# EAGLE board PCB (EAGLE 9.7.0)
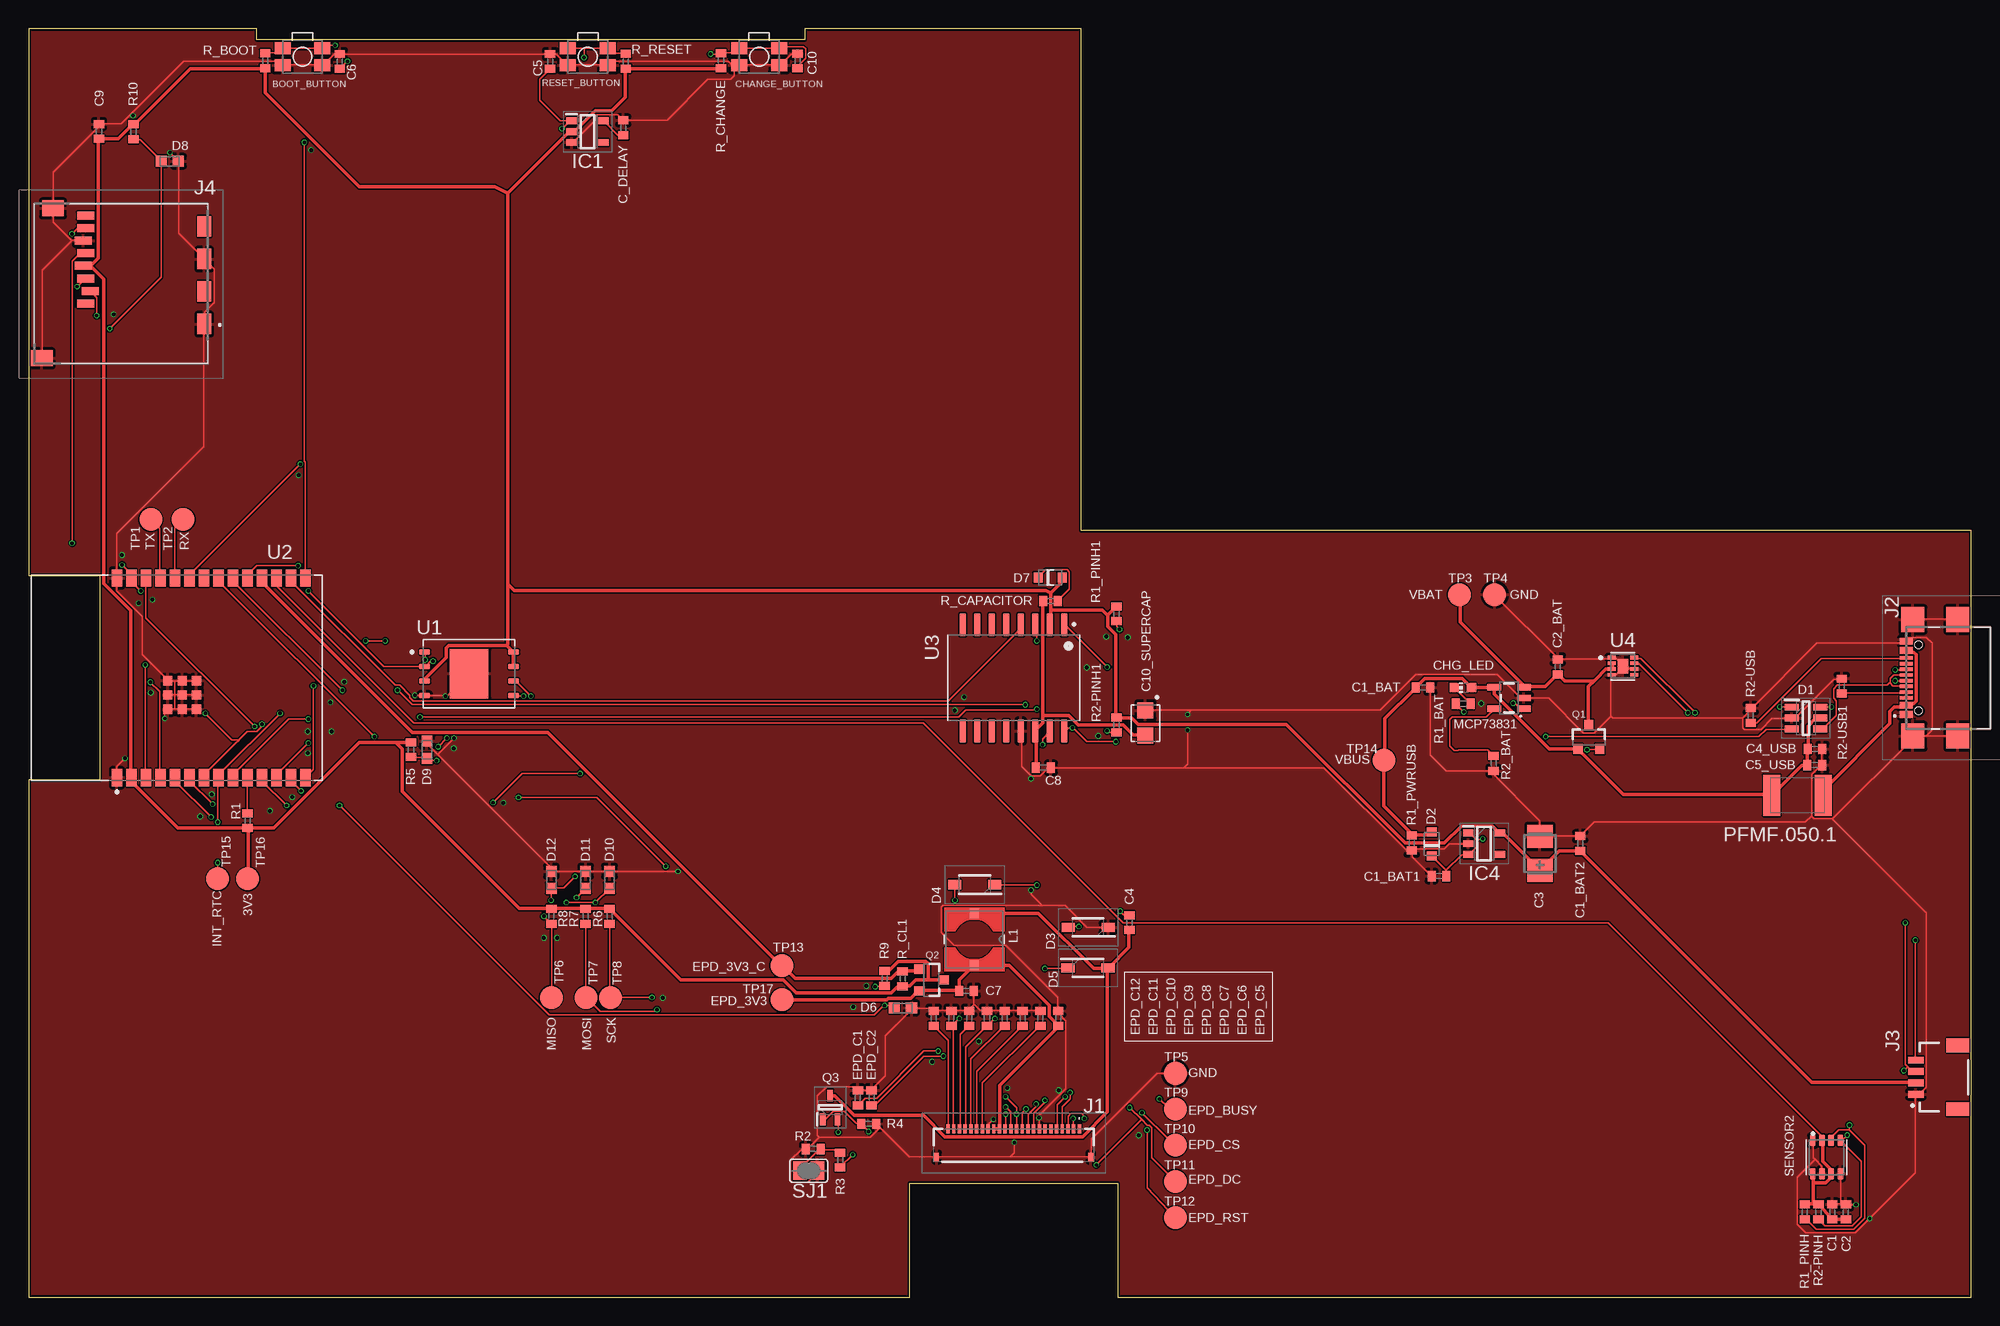
[diagram p0: board, top side]
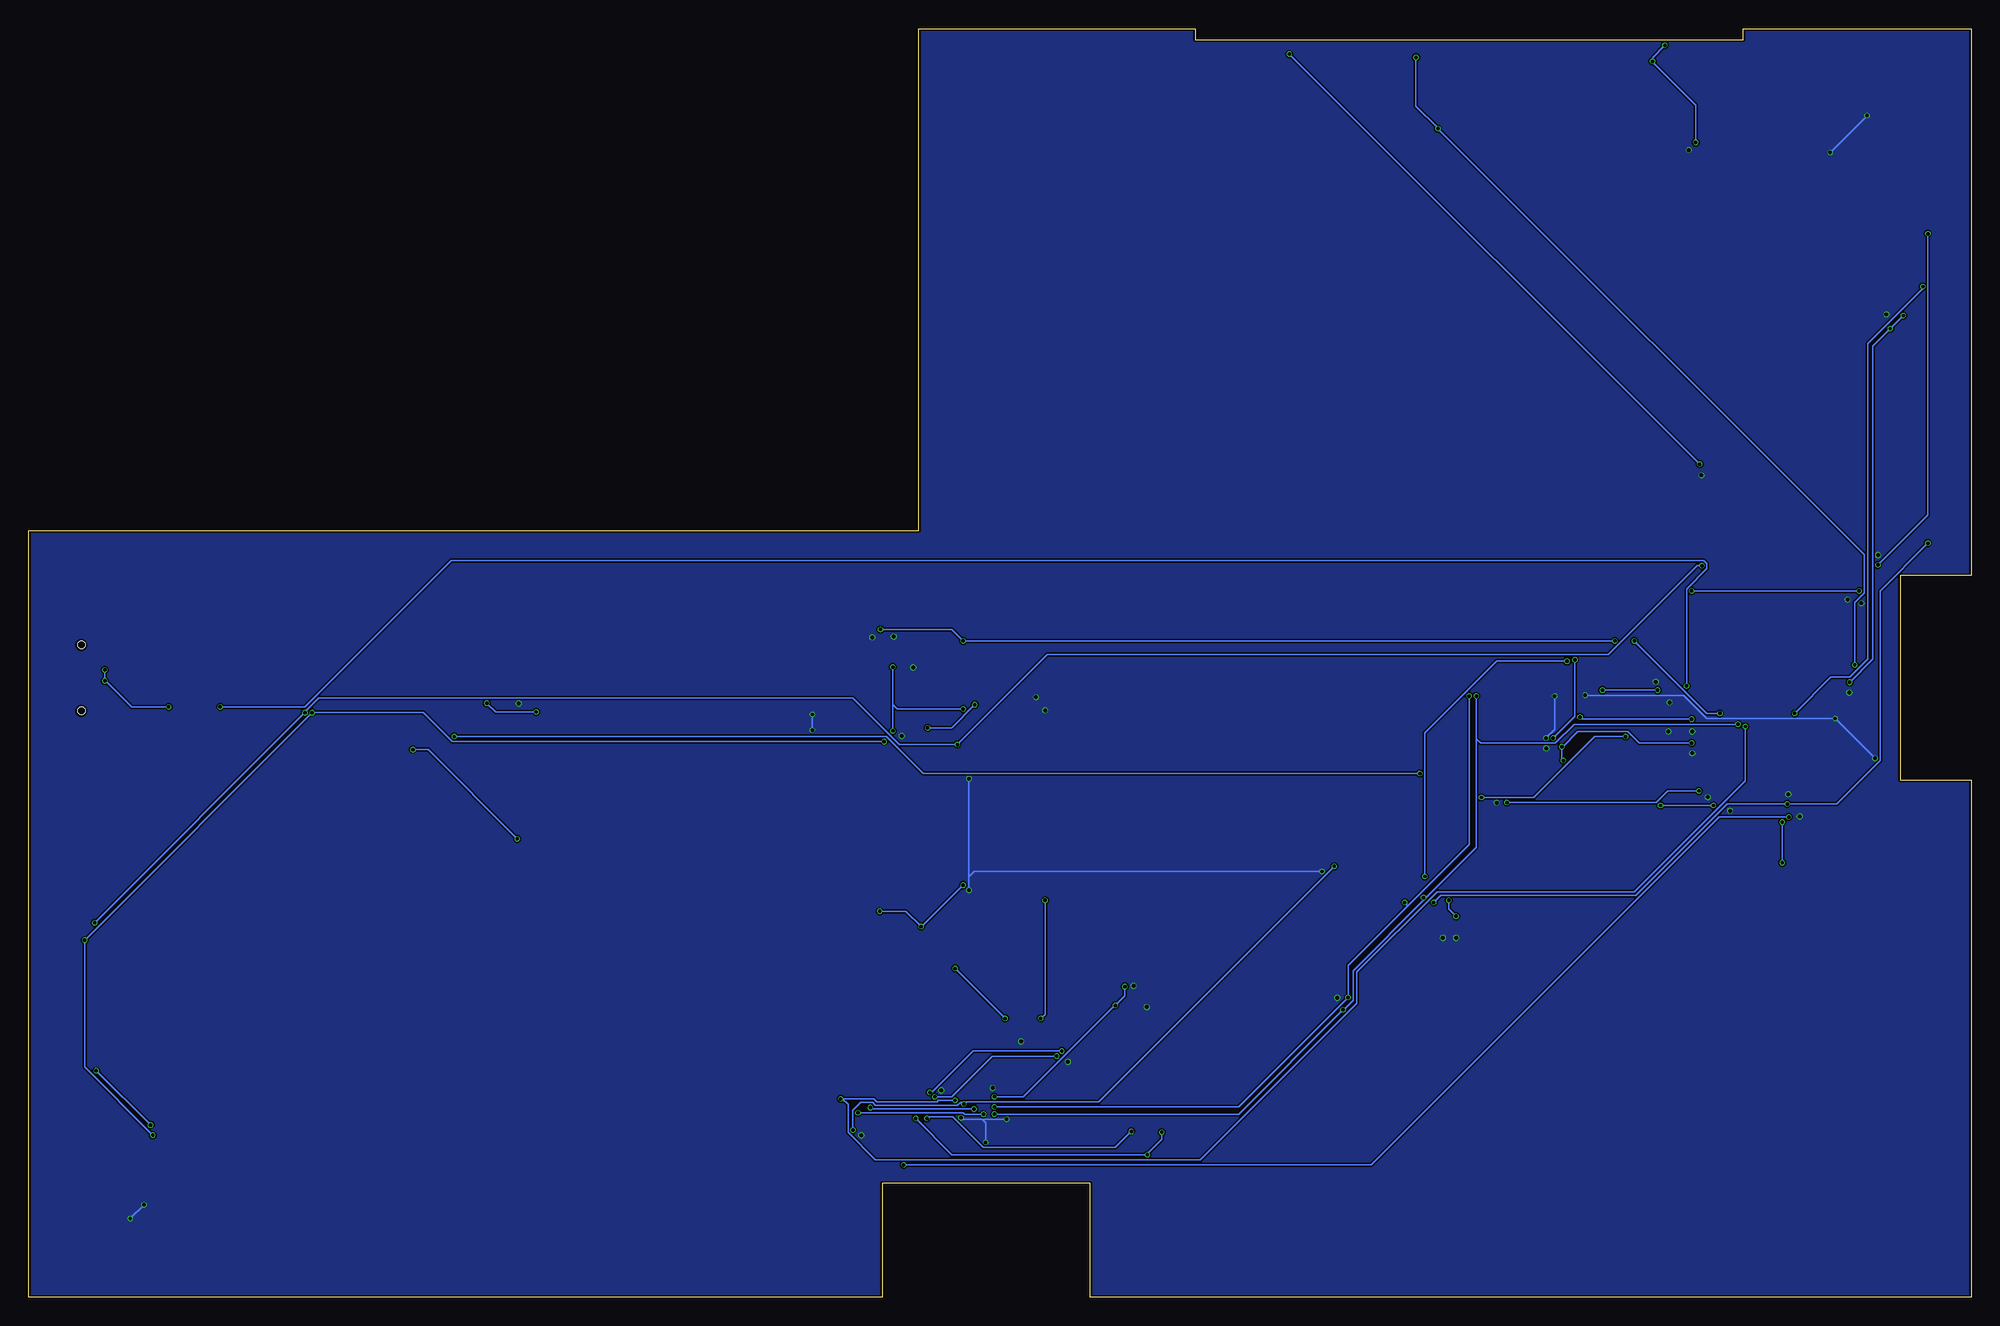
[diagram p1: board, bottom side, seen from below]

Size 170.2 x 111.2 mm. Coordinates in mm from the lower left corner, seen from the top.
Outline: 0,0 77.2,0 77.2,10 95.4,10 95.4,0 170.2,0 170.2,67.2 92.2,67.2 92.2,111.2 68,111.2 68,110.2 20,110.2 20,111.2 0,111.2 0,63.25 6.25,63.25 6.25,45.35 0,45.35 0,0
Copper layers (1*16): Top 0.035mm / dielectric 1.6mm / Bottom 0.035mm
Design rules "jlcpcb-2layers.dru *": minimum track width 5mil, minimum drill 0.3mm, track to track 5mil, track to pad 5mil, pad to pad 5mil, via to via 5mil, smd to smd 5mil, copper to edge 0.2mm, drill to drill 6mil, minimum pad ring 10mil, minimum via ring 3mil, stop-mask expansion 4mil, vias tented up to drill 0mil, thermal gap 10mil
Net classes: 1 NETS: width 0.15 mm; 2 POWER_NETS: width 0.3 mm

## Footprints (pad centres in the part's own frame; a part is rotated, then mirrored left to right if it is on the bottom)
MYBUTTON = smd 1.4 x 1.05: 1 1.75,0.75; 2 -1.75,0.75; 3 -1.75,-0.75; 4 1.75,-0.75
EAGLE-LTSPICE_C0402 = smd 0.7 x 0.9: 1 -0.65,0; 2 0.65,0
RCL_CT3528 = smd 2 x 2.2: + -1.5,0; - 1.5,0
CAPCP3225X100N = smd 1.4 x 1.4: 1 -1.1,0; 2 1.1,0
ADAFRUIT_CHIP-LED0603 = smd 0.8 x 0.8: A 0,-0.75; C 0,0.75
SOT95P280X145-6N = smd 1.2 x 0.6: 1 -1.25,0.95; 2 -1.25,0; 3 -1.25,-0.95; 4 1.25,-0.95; 5 1.25,0; 6 1.25,0.95
ESP32_WROVER_AVX---SD0805S020S1R0_AVX_SD0805S020S1R0_0 = smd 0.8 x 0.9: 1 -1.05,0; 2 1.05,0
SOD3716X135N = smd 1.15 x 0.8: 1 -1.75,0; 2 1.75,0
DIOC1608X36N = smd 0.97 x 0.94: 1 -0.75,0; 2 0.75,0
SOT95P280X125-5N = smd 0.9 x 0.6: 1 -1.4,0.95; 2 -1.4,0; 3 -1.4,-0.95; 4 1.4,-0.95; 5 1.4,0.95
SOT95P280X120-5N = smd 0.9 x 0.6: 1 -1.4,0.95; 2 -1.4,0; 3 -1.4,-0.95; 4 1.4,-0.95; 5 1.4,0.95
FH34SRJ24S05SH99 = smd 0.3 x 0.8: 1 5.75,1.45; 2 5.25,1.45; 3 4.75,1.45; 4 4.25,1.45; 5 3.75,1.45; 6 3.25,1.45; 7 2.75,1.45; 8 2.25,1.45; 9 1.75,1.45; 10 1.25,1.45; 11 0.75,1.45; 12 0.25,1.45; 13 -0.25,1.45; 14 -0.75,1.45; 15 -1.25,1.45; 16 -1.75,1.45; 17 -2.25,1.45; 18 -2.75,1.45; 19 -3.25,1.45; 20 -3.75,1.45; 21 -4.25,1.45; 22 -4.75,1.45; 23 -5.25,1.45; 24 -5.75,1.45 | smd 0.4 x 0.8: MP1 6.75,-1.05; MP2 -6.75,-1.05
SAMACSYS_PARTS_USB4110GFA = smd 0.3 x 1.15: A1 -3.35,3.678; A4 -2.55,3.678; A5 -1.25,3.678; A6 -0.25,3.678; A7 0.25,3.678; A8 1.25,3.678; A9 2.55,3.678; A12 3.35,3.678; B1 3.05,3.678; B4 2.25,3.678; B5 1.75,3.678; B6 0.75,3.678; B7 -0.75,3.678; B8 -1.75,3.678; B9 -2.25,3.678; B12 -3.05,3.678 | smd 2.18 x 2: MP1 -5.11,-0.827; MP2 5.11,-0.827; MP3 -5.11,3.103; MP4 5.11,3.103 | hole 0.65: -2.89,2.603; 2.89,2.603
JST04_1MM_RA = smd 0.6 x 1.35: 1 -1.5,0; 2 -0.5,0; 3 0.5,0; 4 1.5,0 | smd 1.2 x 2: NC1 2.8,-3.675; NC2 -2.8,-3.675
112ATAARR03ATTEND = smd 1.8 x 1.2: G1 10.6,10.4; G2 4.9,10.4; S1 7.75,10.4; S2 2.05,10.4 | smd 1.4 x 1.9: G3 13.6,-3.85; G4 0.45,-2.85 | smd 0.7 x 1.5: P1 8.8,0; P2 7.7,0.4; P3 6.6,0; P4 5.5,-0.2; P5 4.4,0; P6 3.3,-0.2; P7 2.2,0; P8 1.1,0
IND_4828-WE-TPC_WRE = smd 0.889 x 0.762: 1 -2.286,0; 2 2.286,0
ESP32_WROVER_SPARKFUN-IC-POWER_SOT23-5 = smd 0.55 x 1.2: 1 -0.95,-1.3; 2 0,-1.3; 3 0.95,-1.3; 4 0.95,1.3; 5 -0.95,1.3
ESP32C6_VARISTOR_CT/CN1812 = smd 1.5 x 3.6: 1 -2.25,0; 2 2.25,0
ESP32_WROVER_SPARKFUN-DISCRETESEMI_SOT23-3 = smd 0.8 x 0.9: 1 -0.95,-1; 2 0.95,-1; 3 0,1.1
SOT65P210X110-3N = smd 1.05 x 0.5: 1 -1.05,0.65; 2 -1.05,-0.65; 3 1.05,0
ESP32_WROVER_EAGLE-LTSPICE_R0402 = smd 0.7 x 0.9: 1 -0.65,0; 2 0.65,0
ESP32_WROVER_BME680_PSON80P300X300X100-8N = smd 1.016 x 0.5: 1 1.458,1.2; 2 1.458,0.4; 3 1.458,-0.4; 4 1.458,-1.2; 5 -1.458,-1.22; 6 -1.458,-0.4; 7 -1.458,0.4; 8 -1.458,1.2
SJ = smd 1.168 x 1.6: 1 -0.762,0; 2 0.762,0
TP20R = smd 2 x 2: TP 0,0
SON127P600X800X80-9N = smd 0.94 x 0.44: 1 -3.895,1.905; 2 -3.895,0.635; 3 -3.895,-0.635; 4 -3.895,-1.905; 5 3.895,-1.905; 6 3.895,-0.635; 7 3.895,0.635; 8 3.895,1.905 | smd 3.4 x 4.3: 9 0,0
XCVR_ESP32-C6-WROOM-1-N8 = smd 1.5 x 0.9: 1 -8.75,5.26; 2 -8.75,3.99; 3 -8.75,2.72; 4 -8.75,1.45; 5 -8.75,0.18; 6 -8.75,-1.09; 7 -8.75,-2.36; 8 -8.75,-3.63; 9 -8.75,-4.9; 10 -8.75,-6.17; 11 -8.75,-7.44; 12 -8.75,-8.71; 13 -8.75,-9.98; 14 -8.75,-11.25; 15 8.75,-11.25; 16 8.75,-9.98; 17 8.75,-8.71; 18 8.75,-7.44; 19 8.75,-6.17; 20 8.75,-4.9; 21 8.75,-3.63; 22 8.75,-2.36; 23 8.75,-1.09; 24 8.75,0.18; 25 8.75,1.45; 26 8.75,2.72; 27 8.75,3.99; 28 8.75,5.26 | smd 0.8 x 0.8: 29_1 -2.755,0.79; 29_2 -1.505,0.79; 29_3 -0.255,0.79; 29_4 -2.755,-0.46; 29_5 -1.505,-0.46; 29_6 -0.255,-0.46; 29_7 -2.755,-1.71; 29_8 -1.505,-1.71; 29_9 -0.255,-1.71
SOIC127P1032X265-16N = smd 2.05 x 0.59: 1 -4.655,4.445; 2 -4.655,3.175; 3 -4.655,1.905; 4 -4.655,0.635; 5 -4.655,-0.635; 6 -4.655,-1.905; 7 -4.655,-3.175; 8 -4.655,-4.445; 9 4.655,-4.445; 10 4.655,-3.175; 11 4.655,-1.905; 12 4.655,-0.635; 13 4.655,0.635; 14 4.655,1.905; 15 4.655,3.175; 16 4.655,4.445
SON50P200X200X80-9N = smd 0.762 x 0.33: 1 -0.985,0.75; 2 -0.985,0.25; 3 -0.985,-0.25; 4 -0.985,-0.75; 5 0.985,-0.75; 6 0.985,-0.25; 7 0.985,0.25; 8 0.985,0.75 | smd 0.9 x 1.3: 9 0,0

## Placement (x,y rotation side)
BOOT_BUTTON  BUTTON_CUSYOMV1  [MYBUTTON]  24,108.72 180 top
C1  100nF  [EAGLE-LTSPICE_C0402]  158,7.5 90 top
C1_BAT  4.7uF  [EAGLE-LTSPICE_C0402]  122.15,53.45 0 top
C1_BAT1  4.7uF  [EAGLE-LTSPICE_C0402]  123.55,36.93 180 top
C1_BAT2  4.7uF  [EAGLE-LTSPICE_C0402]  135.93,39.79 90 top
C2  100nF  [EAGLE-LTSPICE_C0402]  159.2,7.5 90 top
C2_BAT  4.7uF  [EAGLE-LTSPICE_C0402]  133.95,55.26 90 top
C3  100uF TANT  [RCL_CT3528]  132.4,38.91 90 top
C4  4.7uF/25V  [EAGLE-LTSPICE_C0402]  96.44,32.85 270 top
C4_USB  100nF  [EAGLE-LTSPICE_C0402]  156.5,48.07 0 top
C5  1uF  [EAGLE-LTSPICE_C0402]  45.69,108.32 90 top
C5_USB  4.7uF  [EAGLE-LTSPICE_C0402]  156.48,46.65 0 top
C6  100nF  [EAGLE-LTSPICE_C0402]  27.27,108.32 90 top
C7  10uF  [EAGLE-LTSPICE_C0402]  82.17,26.86 0 top
C8  100nF  [EAGLE-LTSPICE_C0402]  88.9,46.43 0 top
C9  100nF  [EAGLE-LTSPICE_C0402]  6.17,102.18 90 top
C10  100nF  [EAGLE-LTSPICE_C0402]  67.37,108.36 90 top
C10_SUPERCAP  CPH3225A  [CAPCP3225X100N]  97.84,50.34 270 top
C_DELAY  100nF  [EAGLE-LTSPICE_C0402]  52.1,102.5 90 top
CHANGE_BUTTON  BUTTON_CUSYOMV1  [MYBUTTON]  64,108.72 180 top
CHG_LED  [ADAFRUIT_CHIP-LED0603]  125.65,53.44 90 top
D1  USBLC6-2SC6Y  [SOT95P280X145-6N]  155.7,50.77 0 top
D2  ESP32_WROVER_AVX---SD0805S020S1R0_AVX_SD0805S020S1R0_0_0AVX_SD0805S020S1R0_0_0  [ESP32_WROVER_AVX---SD0805S020S1R0_AVX_SD0805S020S1R0_0]  122.92,39.74 90 top
D3  MBR0530  [SOD3716X135N]  92.82,32.42 180 top
D4  MBR0530  [SOD3716X135N]  82.88,36.17 180 top
D5  MBR0530  [SOD3716X135N]  92.81,28.88 0 top
D6  PGB1010603MR  [DIOC1608X36N]  76.6,25.37 0 top
D7  ESP32_WROVER_AVX---SD0805S020S1R0_AVX_SD0805S020S1R0_0_0AVX_SD0805S020S1R0_0_0  [ESP32_WROVER_AVX---SD0805S020S1R0_AVX_SD0805S020S1R0_0]  89.49,63.08 0 top
D8  PGB1010603MR  [DIOC1608X36N]  12.38,99.57 0 top
D9  PGB1010603MR  [DIOC1608X36N]  34.9,48 90 top
D10  PGB1010603MR  [DIOC1608X36N]  50.9,36.6 90 top
D11  PGB1010603MR  [DIOC1608X36N]  48.8,36.6 90 top
D12  PGB1010603MR  [DIOC1608X36N]  45.8,36.6 90 top
EPD_C1  1uF/50V  [EAGLE-LTSPICE_C0402]  72.65,17.49 90 top
EPD_C2  1uF/50V  [EAGLE-LTSPICE_C0402]  73.85,17.5 90 top
EPD_C5  0.1uF/50V  [EAGLE-LTSPICE_C0402]  90.2,24.47 90 top
EPD_C6  1uF/50V  [EAGLE-LTSPICE_C0402]  88.64,24.47 90 top
EPD_C7  1uF/50V  [EAGLE-LTSPICE_C0402]  87.08,24.47 90 top
EPD_C8  1uF/50V  [EAGLE-LTSPICE_C0402]  85.52,24.47 90 top
EPD_C9  1uF/50V  [EAGLE-LTSPICE_C0402]  83.96,24.47 90 top
EPD_C10  1uF/50V  [EAGLE-LTSPICE_C0402]  82.4,24.47 90 top
EPD_C11  1uF/50V  [EAGLE-LTSPICE_C0402]  80.85,24.47 90 top
EPD_C12  1uF/50V  [EAGLE-LTSPICE_C0402]  79.29,24.47 90 top
IC1  BD5229G-TR  [SOT95P280X125-5N]  48.97,102.17 0 top
IC4  XC6220A331MR-G  [SOT95P280X120-5N]  127.51,39.77 0 top
J1  FH34SRJ-24S-0.5SH_99_  [FH34SRJ24S05SH99]  86.3,13.34 0 top
J2  SAMACSYS_PARTS_USB4110-GF-A  [SAMACSYS_PARTS_USB4110GFA]  168.17,54.3 90 top
J3  QWIIC_RIGHT_ANGLE  [JST04_1MM_RA]  165.32,19.3 90 top
J4  112A-TAAR-R03_ATTEND  [112ATAARR03ATTEND]  5,95.9 270 top
L1  68uH  [IND_4828-WE-TPC_WRE]  82.85,31.38 270 top
MCP73831  ESP32_WROVER_SPARKFUN-IC-POWER_MCP73831  [ESP32_WROVER_SPARKFUN-IC-POWER_SOT23-5]  129.7,52.54 90 top
PFMF.050.1  ESP32C6_VARISTORCN1812  [ESP32C6_VARISTOR_CT/CN1812]  154.96,44 180 top
Q1  20V/4.2A/52mΩ/1.4W  [ESP32_WROVER_SPARKFUN-DISCRETESEMI_SOT23-3]  136.69,49.06 0 top
Q2  20V/4.2A/52mΩ/1.4W  [ESP32_WROVER_SPARKFUN-DISCRETESEMI_SOT23-3]  79.06,27.82 270 top
Q3  SI1308EDL-T1-GE3  [SOT65P210X110-3N]  70.22,16.64 90 top
R1  10K  [ESP32_WROVER_EAGLE-LTSPICE_R0402]  19.19,41.78 90 top
R1_BAT  200  [ESP32_WROVER_EAGLE-LTSPICE_R0402]  125.68,52.03 0 top
R1_PINH  10K  [ESP32_WROVER_EAGLE-LTSPICE_R0402]  155.6,7.5 90 top
R1_PINH1  10K  [ESP32_WROVER_EAGLE-LTSPICE_R0402]  95.31,59.91 90 top
R1_PWRUSB  100K  [ESP32_WROVER_EAGLE-LTSPICE_R0402]  121.16,39.82 90 top
R2  2.2  [ESP32_WROVER_EAGLE-LTSPICE_R0402]  68.74,13.01 0 top
R2-PINH  10K  [ESP32_WROVER_EAGLE-LTSPICE_R0402]  156.8,7.5 90 top
R2-PINH1  10K  [ESP32_WROVER_EAGLE-LTSPICE_R0402]  95.31,50.17 90 top
R2-USB  5k1  [ESP32_WROVER_EAGLE-LTSPICE_R0402]  150.87,51 90 top
R2-USB1  5k1  [ESP32_WROVER_EAGLE-LTSPICE_R0402]  158.83,53.57 90 top
R2_BAT  2K  [ESP32_WROVER_EAGLE-LTSPICE_R0402]  128.34,46.81 90 top
R3  0.47  [ESP32_WROVER_EAGLE-LTSPICE_R0402]  71.09,12.04 90 top
R4  10K  [ESP32_WROVER_EAGLE-LTSPICE_R0402]  73.6,15.21 0 top
R5  10K  [ESP32_WROVER_EAGLE-LTSPICE_R0402]  33.5,48 90 top
R6  10K  [ESP32_WROVER_EAGLE-LTSPICE_R0402]  50.9,33.4 90 top
R7  10K  [ESP32_WROVER_EAGLE-LTSPICE_R0402]  48.8,33.4 90 top
R8  10K  [ESP32_WROVER_EAGLE-LTSPICE_R0402]  45.8,33.4 90 top
R9  10K  [ESP32_WROVER_EAGLE-LTSPICE_R0402]  74.99,27.95 90 top
R10  10K  [ESP32_WROVER_EAGLE-LTSPICE_R0402]  9.19,102.16 90 top
R_BOOT  10K  [ESP32_WROVER_EAGLE-LTSPICE_R0402]  20.73,108.38 90 top
R_CAPACITOR  15  [ESP32_WROVER_EAGLE-LTSPICE_R0402]  89.52,61.04 0 top
R_CHANGE  10K  [ESP32_WROVER_EAGLE-LTSPICE_R0402]  60.66,108.39 90 top
R_CL1  10K  [ESP32_WROVER_EAGLE-LTSPICE_R0402]  76.57,27.93 90 top
R_RESET  10K  [ESP32_WROVER_EAGLE-LTSPICE_R0402]  52.31,108.33 90 top
RESET_BUTTON  BUTTON_CUSYOMV1  [MYBUTTON]  49,108.72 180 top
SENSOR2  ESP32_WROVER_BME680_BME680  [ESP32_WROVER_BME680_PSON80P300X300X100-8N]  157.5,12.3 90 top
SJ1  [SJ]  68.34,11.11 180 top
TP1  TPTP20R  [TP20R]  10.71,68.19 0 top
TP2  TPTP20R  [TP20R]  13.55,68.19 0 top
TP3  TPTP20R  [TP20R]  125.35,61.59 0 top
TP4  TPTP20R  [TP20R]  128.43,61.59 0 top
TP5  TPTP20R  [TP20R]  100.47,19.64 0 top
TP6  TPTP20R  [TP20R]  45.81,26.29 0 top
TP7  TPTP20R  [TP20R]  48.85,26.29 0 top
TP8  TPTP20R  [TP20R]  50.97,26.29 0 top
TP9  TPTP20R  [TP20R]  100.47,16.52 0 top
TP10  TPTP20R  [TP20R]  100.47,13.34 0 top
TP11  TPTP20R  [TP20R]  100.47,10.17 0 top
TP12  TPTP20R  [TP20R]  100.47,6.99 0 top
TP13  TPTP20R  [TP20R]  65.98,29.09 0 top
TP14  TPTP20R  [TP20R]  118.72,47.09 0 top
TP15  TPTP20R  [TP20R]  16.56,36.69 0 top
TP16  TPTP20R  [TP20R]  19.2,36.69 0 top
TP17  TPTP20R  [TP20R]  65.98,26.09 0 top
U1  W25Q512JVEIQ  [SON127P600X800X80-9N]  38.59,54.66 0 top
U2  ESP32-C6-WROOM-1-N8  [XCVR_ESP32-C6-WROOM-1-N8]  13,54.3 90 top
U3  DS3231SN#  [SOIC127P1032X265-16N]  86.3,54.3 270 top
U4  MAX17048G+T10  [SON50P200X200X80-9N]  139.67,55.32 0 top

## Library data of the parts
BOOT_BUTTON CHANGE_BUTTON CHG_LED PFMF.050.1 RESET_BUTTON SJ1 TP1-TP17 = DeskAssistant v19 v1
C1 C1_BAT C1_BAT1 C1_BAT2 C2 C2_BAT C4 C4_USB C5 C5_USB C6-C10 C_DELAY EPD_C1 EPD_C2 EPD_C5-EPD_C12 = DeskAssistant v19 v1; SPICEMODEL: NONE; SPICEPREFIX: C
C3 = DeskAssistant v19 v1; SPICEPREFIX: C
C10_SUPERCAP = DeskAssistant v19 v1; AVAILABILITY: Not in stock; CHECK_PRICES: https://www.snapeda.com/parts/CPH3225A/Seiko+Instruments/view-part/?ref=eda; DESCRIPTION: 11 mF (EDLC) Supercapacitor 3.3 V 1210 (3225 Metric) - -; MF: Seiko Instruments; MP: CPH3225A; PACKAGE: 1210 Seiko; PRICE: None; PURCHASE-URL: https://www.snapeda.com/api/url_track_click_mouser/?unipart_id=562593&manufacturer=Seiko Instruments&part_name=CPH3225A&search_term=None; SNAPEDA_LINK: https://www.snapeda.com/parts/CPH3225A/Seiko+Instruments/view-part/?ref=snap
D1 = DeskAssistant v19 v1; AVAILABILITY: In Stock; CHECK_PRICES: https://www.snapeda.com/parts/USBLC6-2SC6Y/STMicroelectronics/view-part/?ref=eda; DESCRIPTION: 17V Clamp 5A (8/20µs) Ipp Tvs Diode Surface Mount SOT-23-6; MF: STMicroelectronics; MP: USBLC6-2SC6Y; PACKAGE: SOT-23-6 STMicroelectronics; PRICE: None; SNAPEDA_LINK: https://www.snapeda.com/parts/USBLC6-2SC6Y/STMicroelectronics/view-part/?ref=snap
D2 D7 = DeskAssistant v19 v1; CENTROID_NOT_SPECIFIED: No; DATASHEET: http://datasheets.avx.com/schottky.pdf; DIGIKEY_DESCRIPTION: DIODE SCHOTTKY 20V 1A 0805; DIGIKEY_PART_NUMBER: 478-7800-1-ND; LEAD_FREE: yes; MF: AVX; MOUSER_PART_NUMBER: 581-SD0805S020S1R0; PACKAGE: 0805 (2012 metric); PREFIX: D; ROHS: yes; TEMPERATURE_RANGE_HIGH: +125°C; TEMPERATURE_RANGE_LOW: -55°C
D3-D5 = DeskAssistant v19 v1; AVAILABILITY: In Stock; CHECK_PRICES: https://www.snapeda.com/parts/MBR0530/Onsemi/view-part/?ref=eda; DESCRIPTION: Diode Schottky 30 V 500mA Surface Mount SOD-123; MF: ON Semiconductor; MP: MBR0530; PACKAGE: SOD-123-2 ON Semiconductor; PRICE: None; PURCHASE-URL: https://www.snapeda.com/api/url_track_click_mouser/?unipart_id=179458&manufacturer=ON Semiconductor&part_name=MBR0530&search_term=None; SNAPEDA_LINK: https://www.snapeda.com/parts/MBR0530/Onsemi/view-part/?ref=snap
D6 D8-D12 = DeskAssistant v19 v1; AVAILABILITY: In Stock; CHECK_PRICES: https://www.snapeda.com/parts/PGB1010603MR/Littelfuse/view-part/?ref=eda; DESCRIPTION: 150V (Typ) Clamp - Ipp Tvs Diode Surface Mount 0603 (1608 Metric); MF: Littelfuse Inc.; MP: PGB1010603MR; PACKAGE: 0603 Littelfuse Inc.; PRICE: None; PURCHASE-URL: https://www.snapeda.com/api/url_track_click_mouser/?unipart_id=5659453&manufacturer=Littelfuse Inc.&part_name=PGB1010603MR&search_term=None; SNAPEDA_LINK: https://www.snapeda.com/parts/PGB1010603MR/Littelfuse/view-part/?ref=snap
IC1 = DeskAssistant v19 v1; DESCRIPTION: Voltage Detector with Adjustable Delay Time: CMOS processes are utilized to develop high precision, low current consumption CMOS reset ICs that allow arbitrary setting of the delay time. The extensive lineup includes both Nch Open Drain and CMOS output types in a wide range of detection voltages (from 2.3V to 6.0V, in 0.1V steps), enabling selection of the ideal solution based on customer requirements. In addition, the entire series is of course both lead-free and RoHS-compliant.; HEIGHT: 1.25mm; MANUFACTURER_NAME: ROHM Semiconductor; MANUFACTURER_PART_NUMBER: BD5229G-TR; MOUSER_PART_NUMBER: 755-BD5229G-TR; MOUSER_PRICE-STOCK: https://www.mouser.co.uk/ProductDetail/ROHM-Semiconductor/BD5229G-TR?qs=4kLU8WoGk0vvnhrrYwdszw%3D%3D
IC4 = DeskAssistant v19 v1; DESCRIPTION: LDO Voltage Regulators; HEIGHT: 1.2mm; MANUFACTURER_NAME: Torex; MANUFACTURER_PART_NUMBER: XC6220A331MR-G; MOUSER_PART_NUMBER: 865-XC6220A331MR-G; MOUSER_PRICE-STOCK: https://www.mouser.co.uk/ProductDetail/Torex-Semiconductor/XC6220A331MR-G?qs=AsjdqWjXhJ8ZSWznL1J0gg%3D%3D
J1 = DeskAssistant v19 v1; DESCRIPTION: 24 Position FFC, FPC Connector Contacts, Top and Bottom 0.020" (0.50mm) Surface Mount, Right Angle; HEIGHT: 1.1mm; MANUFACTURER_NAME: Hirose; MANUFACTURER_PART_NUMBER: FH34SRJ-24S-0.5SH(99); MOUSER_PART_NUMBER: 798-FH34SRJ24S05SH99; MOUSER_PRICE-STOCK: https://www.mouser.co.uk/ProductDetail/Hirose-Connector/FH34SRJ-24S-0.5SH99?qs=vcbW%252B4%252BSTIpKBl5ap9J8Fw%3D%3D
J2 = DeskAssistant v19 v1; DESCRIPTION: CONN USB 2.0 TYPE-C R/A SMT; HEIGHT: 3.26mm; MANUFACTURER_NAME: GCT (GLOBAL CONNECTOR TECHNOLOGY); MANUFACTURER_PART_NUMBER: USB4110-GF-A; MOUSER_PART_NUMBER: 640-USB4110-GF-A; MOUSER_PRICE-STOCK: https://www.mouser.co.uk/ProductDetail/GCT/USB4110-GF-A?qs=KUoIvG%2F9IlYiZvIXQjyJeA%3D%3D
J3 = DeskAssistant v19 v1; PROD_ID: CONN-13694
J4 = DeskAssistant v19 v1; DESCRIPTION: Micro SD Card Socket, Push-Push Type, Top Mount, SMT, H=1.83mm, 10u; HEIGHT: 1.9mm; MANUFACTURER_NAME: ATTEND; MANUFACTURER_PART_NUMBER: 112A-TAAR-R03 ATTEND
L1 = DeskAssistant v19 v1; COPYRIGHT: Copyright (C) 2024 Ultra Librarian. All rights reserved.; MANUFACTURER_PART_NUMBER: 744043680; MFR_NAME: Wurth Electronics
MCP73831 = DeskAssistant v19 v1; PROD_ID: IC-09995
Q1 Q2 = DeskAssistant v19 v1; PROD_ID: TRAN-14388
Q3 = DeskAssistant v19 v1; AVAILABILITY: In Stock; CHECK_PRICES: https://www.snapeda.com/parts/SI1308EDL-T1-GE3/Vishay+Siliconix/view-part/?ref=eda; DESCRIPTION: Si1308EDL-T1-GE3 N-channel MOSFET Transistor, 1.5 A, 30 V, 3-Pin SC-70 | Siliconix / Vishay SI1308EDL-T1-GE3; MF: Vishay Siliconix; MP: SI1308EDL-T1-GE3; PACKAGE: SOT-323 Vishay Semiconductor; PRICE: None; PURCHASE-URL: https://www.snapeda.com/api/url_track_click_mouser/?unipart_id=274603&manufacturer=Vishay Siliconix&part_name=SI1308EDL-T1-GE3&search_term=None; SNAPEDA_LINK: https://www.snapeda.com/parts/SI1308EDL-T1-GE3/Vishay+Siliconix/view-part/?ref=snap
R1 R1_BAT R1_PINH R1_PINH1 R1_PWRUSB R2 R2-PINH R2-PINH1 R2-USB R2-USB1 R2_BAT R3-R10 R_BOOT R_CAPACITOR R_CHANGE R_CL1 R_RESET = DeskAssistant v19 v1; SPICEMODEL: NONE; SPICEPREFIX: R
SENSOR2 = DeskAssistant v19 v1; AVAILABILITY: Unavailable; DESCRIPTION: Integrated Environmental Unit; MF: Bosch Sensortec; MP: BME680; PACKAGE: LGA-8 Bosch Tools; PRICE: None
U1 = DeskAssistant v19 v1; AVAILABILITY: In Stock; CHECK_PRICES: https://www.snapeda.com/parts/W25Q512JVEIQ/Winbond+Electronics/view-part/?ref=eda; DESCRIPTION: FLASH - NOR Memory IC 512Mb (64M x 8) SPI - Quad I/O 133 MHz 8-WSON (8x6); MF: Winbond Electronics; MP: W25Q512JVEIQ; PACKAGE: Package; PRICE: None; SNAPEDA_LINK: https://www.snapeda.com/parts/W25Q512JVEIQ/Winbond+Electronics/view-part/?ref=snap
U2 = DeskAssistant v19 v1; AVAILABILITY: In Stock; CHECK_PRICES: https://www.snapeda.com/parts/ESP32-C6-WROOM-1-N8/Espressif+Systems/view-part/?ref=eda; DESCRIPTION: Multiprotocol Modules ESP32-C6 module, Wi-Fi 6 in 2.4 GHz band, Bluetooth 5, Zigbee 3.0 and Thread. ESP34-WROOM Compatible - ENGINEERING SAMPLE; MF: Espressif Systems; MP: ESP32-C6-WROOM-1-N8; PACKAGE: None; PRICE: None; SNAPEDA_LINK: https://www.snapeda.com/parts/ESP32-C6-WROOM-1-N8/Espressif+Systems/view-part/?ref=snap
U3 = DeskAssistant v19 v1; AVAILABILITY: In Stock; CHECK_PRICES: https://www.snapeda.com/parts/DS3231SN%23/Analog+Devices/view-part/?ref=eda; DESCRIPTION: Extremely Accurate I²C-Integrated RTC/TCXO/Crystal; MF: Analog Devices; MP: DS3231SN#; PACKAGE: SOIC-16 Maxim; PRICE: None; PURCHASE-URL: https://www.snapeda.com/api/url_track_click_mouser/?unipart_id=99048&manufacturer=Analog Devices&part_name=DS3231SN#&search_term=None; SNAPEDA_LINK: https://www.snapeda.com/parts/DS3231SN%23/Analog+Devices/view-part/?ref=snap
U4 = DeskAssistant v19 v1; AVAILABILITY: In Stock; CHECK_PRICES: https://www.snapeda.com/parts/MAX17048G+T10/Analog+Devices/view-part/?ref=eda; DESCRIPTION: 3µA 1-Cell/2-Cell Fuel Gauge with ModelGauge; MF: Analog Devices; MP: MAX17048G+T10; PACKAGE: TDFN-8 Maxim; PRICE: None; PURCHASE-URL: https://www.snapeda.com/api/url_track_click_mouser/?unipart_id=329239&manufacturer=Analog Devices&part_name=MAX17048G+T10&search_term=None; SNAPEDA_LINK: https://www.snapeda.com/parts/MAX17048G+T10/Analog+Devices/view-part/?ref=snap

## Nets
3V3 [POWER_NETS]: C1_BAT2.1 C3.+ C9.1 D7.2 IC1.2 IC4.5 J3.2 J4.P4 Q2.3 R1.1 R1_PINH1.2 R2-PINH1.2 R5.2 R6.2 R7.2 R8.2 R9.2 R10.2 R_BOOT.1 R_CHANGE.1 R_CL1.1 R_RESET.1 TP16.TP U1.3 U1.7 U1.8 U2.2 U3.2
32KHZ [NETS]: R2-PINH1.1 U2.9 U3.1
DN [NETS]: D1.4 J2.A7 J2.B7
DP [NETS]: D1.6 J2.A6 J2.B6
EPD_3V3 [POWER_NETS]: C7.1 EPD_C5.1 J1.15 J1.16 L1.2 Q2.2 TP17.TP
EPD_3V3_C [POWER_NETS]: Q2.1 R_CL1.2 TP13.TP U2.18
EPD_BUSY [NETS]: J1.9 TP9.TP U2.26
EPD_CS [NETS]: D6.1 J1.12 R9.1 TP10.TP U2.11
EPD_DC [NETS]: J1.11 TP11.TP U2.5
EPD_RST [NETS]: J1.10 TP12.TP U2.21
FLASH_CS [NETS]: D9.1 R5.1 U1.1 U2.12
GDR [NETS]: J1.2 Q3.1 R4.1
GND [NETS]: BOOT_BUTTON.1 BOOT_BUTTON.2 C1.2 C1_BAT1.2 C1_BAT2.2 C1_BAT.2 C2.2 C2_BAT.2 C3.- C4_USB.2 C5.2 C5_USB.2 C6.2 C7.2 C8.2 C9.2 C10.2 C10_SUPERCAP.1 C_DELAY.2 CHANGE_BUTTON.1 CHANGE_BUTTON.2 D1.2 D3.1 D6.2 D8.2 D9.2 D10.2 D11.2 D12.2 EPD_C1.2 EPD_C2.2 EPD_C5.2 EPD_C6.2 EPD_C7.2 EPD_C8.2 EPD_C9.2 EPD_C10.2 EPD_C11.2 EPD_C12.2 IC1.3 IC4.2 J1.8 J1.17 J1.MP1 J1.MP2 J2.A1 J2.A12 J2.B1 J2.B12 J2.MP1 J2.MP2 J2.MP3 J2.MP4 J3.1 J4.G1 J4.G2 J4.G3 J4.G4 J4.P6 MCP73831.2 R1_PWRUSB.1 R2-USB1.2 R2-USB.2 R2.1 R2_BAT.1 R4.2 RESET_BUTTON.1 RESET_BUTTON.2 SENSOR2.1 SENSOR2.5 SENSOR2.7 SJ1.1 TP4.TP TP5.TP U1.4 U1.9 U2.1 U2.28 U2.29_1 U2.29_2 U2.29_3 U2.29_4 U2.29_5 U2.29_6 U2.29_7 U2.29_8 U2.29_9 U3.13 U4.1 U4.4 U4.6 U4.9
GPIO8 [NETS]: R1.2 U2.10
I2C_PW [NETS]: C1.1 C2.1 R1_PINH.2 R2-PINH.2 SENSOR2.2 SENSOR2.6 SENSOR2.8 U2.17
INT_RTC [NETS]: R1_PINH1.1 TP15.TP U2.8 U3.3
IO/BOOT [NETS]: BOOT_BUTTON.3 BOOT_BUTTON.4 C6.1 R_BOOT.2 U2.15
IO/CHANGE [NETS]: C10.1 CHANGE_BUTTON.3 CHANGE_BUTTON.4 R_CHANGE.2 U2.23
MISO [NETS]: D12.1 J4.P7 R8.1 TP6.TP U1.2 U2.27
MOSI [NETS]: D11.1 J1.14 J4.P3 R7.1 TP7.TP U1.5 U2.7
N$1 [NETS]: J2.B5 R2-USB.1
N$2 [NETS]: C1_BAT1.1 D2.1 IC4.1 IC4.3 Q1.2
N$3 [NETS]: MCP73831.1 R1_BAT.1
N$4 [NETS]: CHG_LED.C R1_BAT.2
N$5 [NETS]: J2.A5 R2-USB1.1
N$6 [NETS]: MCP73831.5 R2_BAT.2
N$7 [NETS]: C4.1 D3.2 D4.1
N$8 [NETS]: C_DELAY.1 IC1.5
N$10 [NETS]: EPD_C2.1 J1.5
N$12 [NETS]: EPD_C1.1 J1.4
N$14 [NETS]: D7.1 R_CAPACITOR.2
N$17 [NETS]: EPD_C12.1 J1.24
N$19 [NETS]: EPD_C10.1 J1.22
N$21 [NETS]: EPD_C8.1 J1.20
N$22 [NETS]: EPD_C7.1 J1.19
N$23 [NETS]: EPD_C6.1 J1.18
PREVGH [NETS]: D5.1 EPD_C9.1 J1.21
PREVGL [NETS]: D4.2 EPD_C11.1 J1.23
RESE [NETS]: J1.3 Q3.2 R3.1
RESE' [NETS]: R2.2 R3.2 SJ1.2
RESET [NETS]: C5.1 IC1.1 R_RESET.2 RESET_BUTTON.3 RESET_BUTTON.4 U2.3
RTC_RST [NETS]: U2.16 U3.4
RX [NETS]: TP2.TP U2.24
SCK [NETS]: D10.1 J1.13 J4.P5 R6.1 TP8.TP U1.6 U2.6
SCL [NETS]: J3.4 R2-PINH.1 SENSOR2.4 U2.20 U3.16 U4.7
SDA [NETS]: J3.3 R1_PINH.1 SENSOR2.3 U2.19 U3.15 U4.8
SRC [POWER_NETS]: C4.2 D5.2 L1.1 Q3.3
SS_SD [NETS]: D8.1 J4.P2 R10.1 U2.4
TX [NETS]: TP1.TP U2.25
USB_D+ [NETS]: D1.1 U2.14
USB_D- [NETS]: D1.3 U2.13
VBAT [POWER_NETS]: C2_BAT.1 MCP73831.3 Q1.3 TP3.TP U4.2 U4.3
VBUS [POWER_NETS]: C1_BAT.1 C4_USB.1 C5_USB.1 CHG_LED.A D1.5 D2.2 MCP73831.4 PFMF.050.1.2 Q1.1 R1_PWRUSB.2 TP14.TP
VRTC [POWER_NETS]: C8.1 C10_SUPERCAP.2 R_CAPACITOR.1 U3.14
VUSB [POWER_NETS]: J2.A4 J2.A9 J2.B4 J2.B9 PFMF.050.1.1

## Tracks (layer width: path | path; a pad name or v marks a point on that pad's centre or on a via)
3V3
  Top 0.3: 89.53,61.72 90.5,62.69 D7.2 | 89.53,60.26 89.53,58.99 U3.2 | 89.53,60.26 89.53,61.72 | 94.55,59.82 94.55,58.8 95.25,58.1 95.25,50.86 R2-PINH1.2 95.44,50.8 96.65,50.8 97.22,50.23 110.17,50.23 120.59,39.81 124.02,39.81 125.54,41.34 128.21,41.34 128.78,40.77 IC4.5 128.97,40.7 129.16,40.7 132.4,37.47 C3.+ 132.52,37.53 134.11,39.12 135.89,39.12 C1_BAT2.1 136.02,39.05 156.21,18.86 165.29,18.86 J3.2 | 94.55,59.82 95.25,60.52 R1_PINH1.2 | 89.53,60.26 94.04,60.26 94.42,59.88 94.55,59.82 | 78.8,27.81 80.14,27.81 Q2.3 | 78.8,27.81 77.72,27.81 77.22,27.3 76.58,27.3 R_CL1.1 76.45,27.18 76.07,27.18 75.56,26.67 67.25,26.67 66.1,27.81 57.15,27.81 50.99,33.97 R6.2 50.86,34.1 48.9,34.1 R7.2 48.77,34.1 45.85,34.1 R8.2 45.66,34.1 42.98,34.1 32.75,44.33 32.75,48.05 32.16,48.64 | 78.8,27.81 78.8,29.27 78.61,29.46 76.2,29.46 75.37,28.64 74.99,28.64 R9.2 | R1.1 19.24,41.08 19.24,36.7 TP16.TP | 32.16,48.64 33.47,48.64 R5.2 | R1.1 19.37,41.15 21.46,41.15 28.96,48.64 32.15,48.64 32.16,48.64 | R1.1 19.05,41.15 13.08,41.15 9.02,45.21 9.02,45.53 U2.2 8.95,45.66 8.95,60.2 6.6,62.55 6.6,89.22 5.52,90.3 J4.P4 4.83,90.42 5.46,90.42 6.1,91.06 6.1,101.41 C9.1 6.22,101.54 7.87,101.54 9.14,102.81 R10.2 9.34,102.87 14.16,107.7 20.7,107.7 R_BOOT.1 20.73,105.58 28.97,97.34 40.85,97.34 41.97,96.77 | 41.91,57.15 36.83,57.15 36.58,56.9 36.58,56.07 34.73,54.23 34.73,54.04 U1.3 | 41.91,57.15 42.48,56.58 U1.8 42.48,56.45 42.48,55.31 U1.7 | R_CHANGE.1 60.64,107.7 52.45,107.7 R_RESET.1 52.26,107.63 52.26,105.17 51.08,103.98 49.64,103.98 47.83,102.17 IC1.2 47.43,102.23 41.97,96.77
  Top 0.3: 41.97,96.77 41.97,62.51 | 41.97,62.51 41.97,57.28 41.91,57.15 | 89.53,61.72 89.11,61.94 42.55,61.94 41.97,62.51
32KHZ  (via drill 0.3)
  Top 0.15: v94.49,49.66 94.61,49.53 95.25,49.53 R2-PINH1.1 | v94.49,55.24 90.81,58.93 U3.1 | v24.51,50.67 22.8,50.67 17.91,45.78 17.91,45.59 U2.9 | v34.29,50.86 81.47,50.86 82.11,51.5 88.27,51.5 v88.33,51.56
  Bottom 0.15: v94.49,55.24 94.49,52.05 94.49,51.95 | 94.49,51.95 94.49,51.75 94.49,51.56 v94.49,49.66 | v24.51,50.67 34.1,50.67 v34.29,50.86 | v88.33,51.56 94.1,51.56 94.49,51.95
DN
  Top 0.15: 163.07,53.85 163.32,53.59 164.47,53.59 J2.B7 | 163.07,53.85 163.07,54.23 163.39,54.55 164.47,54.55 J2.A7 | D1.4 156.97,49.85 157.23,49.85 158.37,50.99 158.37,52.26 158.12,52.51 158.12,53.34 158.43,53.66 162.81,53.66 163,53.85 163.07,53.85
DP  (via drill 0.3)
  Top 0.15: v163.51,54.04 164.47,54.04 J2.A6 | v163.51,54.99 164.47,54.99 J2.B6 | v157.92,51.75 156.97,51.75 D1.6
  Bottom 0.15: v163.51,54.99 v163.51,54.04 163.45,54.04 161.16,51.75 v157.92,51.75
EPD_3V3
  Top 0.3: J1.16 84.58,14.8 85.03,14.8 J1.15 85.09,14.92 85.09,18.61 90.17,23.69 EPD_C5.1 90.17,23.88 89.41,24.64 89.41,25.59 85.92,29.08 83,29.08 L1.2 82.8,29.08 81.53,27.81 81.53,26.86 C7.1 81.41,26.92 78.11,26.92 Q2.2 77.92,26.86 77.28,26.23 75.31,26.23 75.18,26.1 66.04,26.1 TP17.TP
EPD_3V3_C
  Top 0.3: Q2.1 78.04,28.77 77.92,28.64 76.58,28.64 R_CL1.2 76.45,28.51 76.14,28.51 75.56,27.94 67.18,27.94 66.04,29.08 TP13.TP 65.85,29.15 45.47,49.53 33.59,49.53 20.45,62.67 20.45,62.99 U2.18
EPD_BUSY  (via drill 0.3)
  Top 0.15: v89.03,17.27 89.03,17.08 88.08,16.13 88.08,14.8 J1.9 | TP9.TP 99.82,16.64 v99.06,17.4 | v19.81,50.04 10.29,59.56 10.29,62.99 U2.26
  Bottom 0.15: v89.03,17.27 90.49,17.27 90.61,17.14 95.89,17.14 96.14,17.4 98.9,17.4 | v19.81,50.04 19.81,45.28 29.53,35.56 46.8,35.56 53.85,28.51 53.85,25.78 67.56,12.06 96.01,12.06 98.41,14.46 98.41,16.91 98.9,17.4 | 98.9,17.4 v99.06,17.4
EPD_CS  (via drill 0.3)
  Top 0.15: J1.12 v86.55,16.07 86.55,16.64 v85.6,17.59 | TP10.TP 99.82,13.91 v97.54,16.19 | v74.17,27.24 74.93,27.24 R9.1 | D6.1 75.82,25.4 75.63,25.59 v74.99,25.59 74.93,25.59 74.11,24.77 45.59,24.77 v27.24,43.12 | v22.61,43.12 20.45,45.28 20.45,45.53 U2.11
  Bottom 0.15: v86.55,16.07 88.2,16.07 88.33,16.19 v97.54,16.19 | v74.17,27.24 74.17,26.42 v74.99,25.59 75.06,25.59 83.06,17.59 v85.6,17.59 | v27.24,43.12 v22.61,43.12
EPD_DC  (via drill 0.3)
  Top 0.15: v87.38,16.51 87.06,16.19 J1.11 | 97.5,15.59 v96.46,16.64 | v16,42.1 12.83,45.28 12.83,45.53 U2.5 | 97.5,15.59 v93.53,11.62 | 97.5,15.59 98,15.1 98.16,15.1 98.41,14.85 98.41,12.22 TP11.TP
  Bottom 0.15: v87.38,16.51 96.33,16.51 v96.46,16.64 | v16,42.1 22.1,42.1 52.58,11.62 v93.53,11.62
EPD_RST  (via drill 0.3)
  Top 0.15: v88.27,16.95 88.27,16.76 87.57,16.07 87.57,14.8 J1.10 | TP12.TP 97.98,9.6 v97.98,14.67 | v30.29,49.15 16.64,62.8 16.64,62.99 U2.21 | v42.93,43.81 49.78,43.81 v55.82,37.78
  Bottom 0.15: v97.98,14.67 97.98,16.38 97.28,17.08 96.27,17.08 96.01,16.83 88.84,16.83 88.56,17.11 88.42,17.11 v88.27,16.95 88.2,16.95 88.01,17.14 76.45,17.14 v55.82,37.78 | v30.29,49.15 33.02,49.15 38.35,43.81 v42.93,43.81
FLASH_CS  (via drill 0.3)
  Top 0.15: R5.1 33.53,47.31 34.86,47.31 D9.1 34.92,47.18 35.05,47.05 v35.75,47.05 | v34.73,55.88 34.73,56.52 U1.1 | v35.88,48.26 v36.64,49.02 | v24.51,48.58 21.72,45.78 21.72,45.59 U2.12
  Bottom 0.15: v34.73,55.88 34.73,50.93 v36.64,49.02 | v35.75,47.05 35.88,47.18 v35.88,48.26 35.81,48.26 34.48,49.59 30.1,49.59 29.08,48.58 v24.51,48.58
GDR  (via drill 0.3)
  Top 0.15: v91.5,15.68 91.5,14.8 J1.2 | v73.6,14.54 72.96,15.18 R4.1 72.9,15.24 72.52,15.24 71.44,16.32 70.48,16.32 69.79,15.62 69.6,15.62 Q3.1
  Bottom 0.15: v91.5,15.68 91.35,15.84 89.24,15.84 86.55,13.14 74.99,13.14 v73.6,14.54
GND  (via drill 0.3, 0.35)
  Top 0.15: IC1.3 47.62,101.28 47.75,101.28 49.66,103.19 49.66,103.5 49.78,103.63 51.63,103.63 52.07,103.19 C_DELAY.2 52.13,103.19 55.94,103.19 59.5,106.75 61.5,106.75 61.83,107.08 61.83,107.78 | C10.2 67.31,108.97 66.8,108.97 65.79,107.95 CHANGE_BUTTON.2 65.72,108.01 62.29,108.01 CHANGE_BUTTON.1 | 62.23,107.95 CHANGE_BUTTON.1 | 3.75,92.65 4.76,92.65 J4.P6 | 3.75,92.65 2.16,94.23 2.16,95.38 J4.G4 2.16,95.5 2.16,98.61 6.16,102.62 6.16,102.81 C9.2 6.22,102.87 8.13,102.87 8.98,103.73 | J4.G3 1.21,82.36 1.21,90.04 3.75,92.58 3.75,92.65 | 8.98,103.73 13.59,108.33 21.91,108.33 22.23,108.01 BOOT_BUTTON.1 22.29,108.01 25.72,108.01 BOOT_BUTTON.2 25.78,107.95 26.8,108.97 27.24,108.97 C6.2 27.3,108.97 45.66,108.97 C5.2 45.72,108.97 46.23,108.97 47.24,107.95 RESET_BUTTON.1 47.31,108.01 50.74,108.01 RESET_BUTTON.2 50.8,108.01 51.12,108.33 61.28,108.33 61.83,107.78 | 61.83,107.78 61.91,107.7 CHANGE_BUTTON.1 | 36.51,52.77 36.7,52.77 38.54,54.61 U1.9 | 36.51,52.77 34.73,52.77 U1.4 34.67,52.77 v33.85,52.77 | 35.85,47.59 45.78,37.66 45.78,37.4 D12.2 45.85,37.34 48.77,37.34 D11.2 48.83,37.34 50.86,37.34 D10.2 50.93,37.34 v56.9,37.34 | 35.85,47.59 34.92,48.51 34.92,48.7 D9.2 | 35.85,47.59 v37.27,49.02 | v36.51,52.7 36.51,52.77 | 12.83,51.56 13.4,51.56 U2.29_4 13.53,51.56 14.67,51.56 U2.29_7 | 12.83,51.56 12.26,51.56 U2.29_1 12.19,51.5 11.94,51.24 v11.94,50.74 | v8.45,47.24 7.75,46.55 7.75,45.59 U2.1 | 12.83,52.83 13.4,52.83 U2.29_5 13.53,52.83 14.67,52.83 U2.29_8 | 12.83,52.83 12.26,52.83 U2.29_2 | 12.83,54.04 13.4,54.04 U2.29_6 13.53,54.04 14.67,54.04 U2.29_9 | 12.83,54.04 12.26,54.04 U2.29_3 12.19,54.1 9.97,56.33 9.97,59.69 7.75,61.91 7.75,62.99 U2.28 7.75,63.12 7.75,66.93 15.37,74.55 15.37,85.28 J4.G1 15.43,85.34 15.43,86.36 16.26,87.19 16.26,90.11 15.43,90.93 J4.G2 15.37,91.06 13.14,93.28 13.14,99.57 D8.2 13.08,99.63 v12.38,100.33
  Top 0.15: 12.83,54.04 12.83,52.83 | 12.83,52.83 12.83,51.56 | v9.14,103.57 8.98,103.73 | C1_BAT.2 122.81,53.4 122.81,47.55 124.2,46.16 R2_BAT.1 128.21,46.16 128.11,46.06 132.4,41.78 C3.- 132.46,40.45 135.89,40.45 C1_BAT2.2 137.14,41.65 155.63,41.65 156.15,42.16 156.21,42.16 | 158.75,8.19 159.19,8.19 C2.2 159.26,8.13 v160.08,8.13 | 158.75,8.19 158.05,8.19 C1.2 | 158.75,8.19 158.75,10.79 SENSOR2.5 | 156.5,12.1 156.34,12.26 156.34,13.72 SENSOR2.1 | 156.5,12.1 157.1,11.49 157.1,10.86 SENSOR2.7 | 156.5,12.1 154.94,10.54 154.94,6.41 155.7,5.65 160.02,5.65 v161.29,6.92 165.29,10.92 165.29,17.78 J3.1 165.35,17.84 165.67,17.84 166.24,18.41 166.24,33.72 158.05,41.91 158.05,41.97 | 164.53,57.85 164.53,58.86 165.04,59.37 J2.MP4 165.1,59.44 168.97,59.44 J2.MP2 | 164.53,57.85 164.53,57.66 J2.A12 164.53,57.59 164.53,57.4 J2.B1 164.47,57.34 156.66,57.34 150.94,51.63 R2-USB.2 150.81,51.63 150.81,51.44 150.18,50.8 | C4_USB.2 157.1,48.07 157.1,46.67 C5_USB.2 157.04,46.67 156.21,45.85 156.21,42.16 | J2.B12 164.53,51.24 164.53,50.99 J2.A1 164.53,50.93 164.53,49.72 165.04,49.21 J2.MP3 | 156.21,42.16 156.4,41.97 158.05,41.97 | 158.05,41.97 165.04,48.96 165.04,49.15 J2.MP3 | 166.25,49.21 165.1,49.21 J2.MP3 | 166.25,49.21 168.97,49.21 J2.MP1 | 164.53,57.85 166.25,57.85 166.75,57.35 166.75,49.71 166.25,49.21 | v84.52,15.62 84.07,15.18 84.07,14.8 J1.17 | J1.8 88.52,14.8 v88.52,15.75 88.52,15.94 90.87,18.29 90.87,24.26 90.23,24.89 90.23,25.08 EPD_C5.2 90.17,25.15 90.17,26.29 85.6,30.86 81.09,30.86 79.95,32 79.95,34.23 80.07,34.35 88.8,34.35 | 88.8,34.35 90.81,34.35 92.71,32.45 94.55,32.45 D3.1
  Top 0.15: SJ1.1 69.09,11.05 69.09,10.92 68.26,10.1 66.86,10.1 66.74,10.22 66.74,12 67.69,12.95 68.07,12.95 R2.1 68.14,13.02 68.26,13.02 69.28,14.03 | 69.28,14.03 73.72,14.03 74.55,14.86 R4.2 74.3,15.18 77.15,12.32 79.5,12.32 J1.MP2 79.57,12.32 86,12.32 | EPD_C6.2 88.58,25.15 87.12,25.15 EPD_C7.2 87.06,25.15 85.53,25.15 EPD_C8.2 85.47,25.15 84.01,25.15 EPD_C9.2 83.95,25.15 83.38,25.15 82.87,25.65 82.8,25.65 | 82.8,25.65 82.8,26.8 C7.2 | 82.8,25.65 82.36,25.21 EPD_C10.2 82.36,25.15 80.9,25.15 EPD_C11.2 80.83,25.15 79.31,25.15 EPD_C12.2 79.25,25.15 79.06,25.34 77.41,25.34 D6.2 77.41,25.27 75.05,22.92 75.05,19.42 73.85,18.22 EPD_C2.2 73.79,18.16 72.71,18.16 EPD_C1.2 72.58,18.16 72.26,18.48 69.91,18.48 69.09,17.65 69.09,14.22 69.28,14.03 | 86,12.32 93.03,12.32 J1.MP1 93.09,12.32 93.09,13.88 98.85,19.64 TP5.TP | v86.36,13.59 86.36,12.68 86,12.32 | 87.82,45.72 88.65,45.72 89.34,46.42 89.53,46.42 C8.2 89.6,46.42 101.2,46.42 | 87.82,45.72 87,46.55 87,49.59 U3.13 | R1_PWRUSB.1 121.22,39.12 121.22,38.61 122.87,36.96 C1_BAT1.2 | IC4.2 126.05,39.75 124.46,39.75 124.02,39.31 121.47,39.31 121.28,39.12 R1_PWRUSB.1 | 101.2,46.42 113.47,46.42 120.71,39.18 121.09,39.18 R1_PWRUSB.1 | 150.18,50.8 150.18,49.91 150.3,49.78 151.76,49.78 152.72,50.74 154.43,50.74 D1.2 154.5,50.8 154.75,50.8 158.12,54.17 158.81,54.17 R2-USB1.2 | U4.9 139.64,55.31 139.64,55.18 139.06,54.61 138.75,54.61 U4.4 138.62,54.55 138.62,50.93 | U4.9 139.7,55.37 139.06,56.01 138.75,56.01 U4.1 138.62,56.07 138.49,55.94 133.99,55.94 C2_BAT.2 133.99,56.01 128.46,61.53 TP4.TP | U4.6 140.65,55.12 139.64,55.12 U4.9
  Top 0.15: 138.62,50.93 137.16,49.47 136.21,49.47 133.16,52.51 131,52.51 MCP73831.2 130.94,52.58 130.68,52.58 128.65,54.61 121.54,54.61 118.43,51.5 101.85,51.5 | 101.85,51.5 97.85,51.5 C10_SUPERCAP.1 | 150.18,50.8 138.76,50.8 138.63,50.93 138.62,50.93 | 101.85,51.5 101.54,51.19 v101.54,51.09 | 87.82,45.72 v87.82,45.47 | v87.82,35.69 87.82,35.33 88.8,34.35 | v101.54,49.72 101.54,46.76 101.2,46.42
  Bottom 0.15: v36.51,52.7 36.51,49.78 v37.27,49.02 | v8.45,47.24 v11.94,50.74 23.18,50.74 25.21,52.77 v33.85,52.77 | v12.38,100.33 v9.14,103.57 | v161.29,6.92 v160.08,8.13 | 86.65,15.62 88.39,15.62 v88.52,15.75 | 86.65,15.62 v84.52,15.62 | v86.36,13.59 86.36,15.3 86.65,15.59 86.65,15.62 | v101.54,51.09 v101.54,49.72 | v87.82,45.47 87.82,36.87 | v87.82,35.69 87.82,36.87 | v56.9,37.34 87.35,37.34 87.82,36.87
  other vias: 7.45,86.15 24.75,100.55 23.65,72.05 10.85,61.15 94.4,57.9 96.3,57.85 93.7,49.2 92.7,55.2 81.15,51.45 81.95,52.6 127.25,52.06 79.15,20.65 83.25,22.45 72.25,25.45 73.4,27.3 55.55,26.25 46.3,31.5 45.15,31.5 27.65,53.95 26.45,52.15 24.45,49.6 26.55,49.6 24.45,47.7 23.1,43.85 21.15,42.65 15.05,42.15 16.05,44.1 10.7,53 37.25,48.12 41.6,43.35 9.64,60.84 8.18,65.05 85.75,18.35 90.24,18.14 97.25,14.2
  pour Top: 6.31,45.31 6.29,45.29 6.27,45.27 0.08,45.27 0.08,0.08 77.12,0.08 77.12,10.02 77.14,10.04 77.16,10.06 77.18,10.08 95.42,10.08 95.44,10.06 95.46,10.04 95.48,10.02 95.48,0.08 170.12,0.08 170.12,67.12 92.18,67.12 92.16,67.14 92.14,67.16 92.12,67.18 92.12,111.12 68.08,111.12 68.08,110.18 68.06,110.16 68.04,110.14 68.02,110.12 19.98,110.12 19.96,110.14 19.94,110.16 19.92,110.18 19.92,111.12 0.08,111.12 0.08,63.33 6.27,63.33 6.29,63.31 6.31,63.29 6.33,63.27 6.33,45.33
  pour Bottom: 6.31,45.31 6.29,45.29 6.27,45.27 0.08,45.27 0.08,0.08 77.12,0.08 77.12,10.02 77.14,10.04 77.16,10.06 77.18,10.08 95.42,10.08 95.44,10.06 95.46,10.04 95.48,10.02 95.48,0.08 170.12,0.08 170.12,67.12 92.18,67.12 92.16,67.14 92.14,67.16 92.12,67.18 92.12,111.12 68.08,111.12 68.08,110.18 68.06,110.16 68.04,110.14 68.02,110.12 19.98,110.12 19.96,110.14 19.94,110.16 19.92,110.18 19.92,111.12 0.08,111.12 0.08,63.33 6.27,63.33 6.29,63.31 6.31,63.29 6.33,63.27 6.33,45.33
GPIO8
  Top 0.15: R1.2 19.18,42.48 19.18,45.53 U2.10
I2C_PW
  Top 0.15: 157.1,14.1 157.1,14.12 138.39,32.83 95.89,32.83 78.38,50.33 33.76,50.33 21.72,62.38 21.72,62.67
  Top 0.3: C2.1 158.05,6.86 C1.1 157.92,6.99 156.84,8.06 R2-PINH.2 156.78,8.19 156.34,8.19 | 156.34,8.19 155.64,8.19 R1_PINH.2 | 156.34,8.19 156.34,10.03 | 156.34,10.03 156.34,10.79 SENSOR2.8 | 156.34,10.03 157.42,10.03 157.86,10.48 157.86,10.79 SENSOR2.6 157.86,10.99 157.86,11.24 157.16,11.94 157.16,13.72 SENSOR2.2 157.1,13.91 157.1,14.1 | 21.72,62.67 21.72,62.99 U2.17
INT_RTC  (via drill 0.3)
  Top 0.15: v95.57,58.55 95.31,58.8 95.31,59.24 R1_PINH1.1 | v88.33,57.53 88.33,58.86 88.27,58.93 U3.3 | v16.57,41.66 16.57,45.53 U2.8 16.64,45.59 16.64,45.78 v22.04,51.18 | v16.57,38.1 16.57,36.7 TP15.TP | v29.53,57.53 v31.24,57.53
  Bottom 0.15: v95.57,58.55 89.34,58.55 v88.33,57.53 v31.24,57.53 | v16.57,38.1 v16.57,41.66 | v29.53,57.53 23.18,51.18 v22.04,51.18
IO/BOOT  (via drill 0.3)
  Top 0.15: R_BOOT.2 20.77,109.09 21.84,109.09 22.23,109.47 BOOT_BUTTON.4 22.29,109.47 25.72,109.47 BOOT_BUTTON.3 25.78,109.54 25.97,109.73 v26.86,109.73 | v27.94,108.33 27.3,107.7 C6.1 | v24.16,101.22 24.16,73.29 24.24,73.2 U2.15
  Bottom 0.15: v26.86,109.73 27.94,108.65 v27.94,108.33 27.94,108.27 24.16,104.48 v24.16,101.22
IO/CHANGE  (via drill 0.3)
  Top 0.15: C10.1 67.37,107.76 67.37,107.89 68.07,108.58 68.07,109.41 67.88,109.6 65.85,109.6 65.79,109.54 CHANGE_BUTTON.3 65.72,109.47 62.29,109.47 CHANGE_BUTTON.4 62.23,109.47 61.85,109.09 60.71,109.09 R_CHANGE.2 60.64,108.97 v59.75,108.97 | v23.81,73.03 14.1,63.31 U2.23
  Bottom 0.15: v59.75,108.97 v23.81,73.03
MISO  (via drill 0.3)
  Top 0.15: TP6.TP 45.85,26.35 45.85,32.7 R8.1 45.78,32.77 v45.15,33.4 | v45.78,34.8 45.78,35.81 D12.1 45.85,35.88 46.86,35.88 v47.88,36.89 | v24.51,61.91 31.11,55.31 34.67,55.31 U1.2 34.73,55.24 35.24,55.75 v35.43,55.75 | v9.84,61.91 9.02,62.74 9.02,62.99 U2.27 9.02,63.12 9.02,63.37 v8.19,64.2 | v3.81,93.22 4.25,93.66 4.95,93.66 J4.P7
  Bottom 0.15: v45.78,34.8 45.78,34.04 v45.15,33.4 | v9.84,61.91 v24.51,61.91 | v3.81,93.22 3.81,68.58 v8.19,64.2 | v47.88,36.89 47.88,49.47 41.59,55.75 v35.43,55.75
MOSI  (via drill 0.3)
  Top 0.15: v85.6,16.07 85.6,14.8 J1.14 | v55.05,25.21 54.93,25.08 50.1,25.08 48.9,26.29 TP7.TP 48.83,26.35 48.83,32.7 R7.1 | v43.37,52.7 42.55,52.7 U1.5 | v48.01,35.05 48.77,35.81 D11.1 | 18.45,48.86 18.13,48.55 15.37,45.78 15.37,45.59 U2.7 | v20.45,50.23 20.45,50.04 20,49.59 19.18,49.59 18.47,48.88 18.45,48.86 | v4.25,88.58 4.95,89.28 J4.P3 | v15.49,51.18 17.81,48.86 18.45,48.86
  Bottom 0.15: v85.6,16.07 64.2,16.07 v55.05,25.21 54.99,25.21 54.17,26.04 54.17,28.64 47.88,34.92 | 43.37,48.95 43.37,39.43 47.88,34.92 | v43.37,52.7 43.37,48.95 | 47.88,34.92 v48.01,35.05 | v20.45,50.23 34.8,50.23 36.45,48.58 43,48.58 43.37,48.95 | v4.25,88.58 4.25,88.39 9.08,83.57 9.08,55.94 10.67,54.36 12.32,54.36 v15.49,51.18
N$1
  Top 0.15: R2-USB.1 151.38,50.35 157.04,56.01 164.47,56.01 J2.B5
N$2  (via drill 0.3)
  Top 0.15: 124.14,37.47 124.14,36.96 C1_BAT1.1 | 124.14,37.47 122.94,38.67 D2.1 | 124.14,37.47 124.21,37.47 125.54,38.8 126.05,38.8 IC4.3 126.17,38.8 126.81,39.43 126.81,40.13 | 126.81,40.13 126.24,40.7 126.11,40.7 IC4.1 | v136.53,48.01 137.6,48.01 Q1.2 | v127.39,40.2 127.32,40.13 126.81,40.13
  Bottom 0.15: v136.53,48.01 135.2,48.01 v127.39,40.2
N$3  (via drill 0.3)
  Top 0.15: v125.73,51.31 125.03,52.01 R1_BAT.1 | v130.05,52.07 130.24,52.07 130.68,51.63 130.94,51.63 MCP73831.1
  Bottom 0.15: v125.73,51.31 129.29,51.31 v130.05,52.07
N$4
  Top 0.15: CHG_LED.C 126.31,52.03 R1_BAT.2
N$5
  Top 0.15: R2-USB1.1 158.88,52.96 164.4,52.96 164.47,53.02 J2.A5
N$6
  Top 0.15: R2_BAT.2 127.84,47.96 125.26,47.96 125.25,47.95 124.9,47.95 124.5,48.35 124.5,50.65 124.73,50.88 127.69,50.88 MCP73831.5
N$7  (via drill 0.3)
  Top 0.15: v95.63,33.85 95.95,33.53 96.39,33.53 C4.1 | v92.01,32.51 91.19,32.51 91.12,32.45 D3.2 | v88.33,36.13 84.64,36.13 D4.1
  Bottom 0.15: v95.63,33.85 93.34,33.85 v92.01,32.51 91.95,32.51 v88.33,36.13
N$8
  Top 0.15: C_DELAY.1 52.07,101.85 51.63,101.85 50.42,103.06 IC1.5
N$10  (via drill 0.3)
  Top 0.15: v90.81,17.59 90.11,16.89 90.11,14.8 J1.5 | v80.14,21.14 78.42,21.14 74.17,16.89 73.85,16.89 EPD_C2.1
  Bottom 0.15: v90.81,17.59 89.34,17.59 85.79,21.14 v80.14,21.14
N$12  (via drill 0.3)
  Top 0.15: v91.25,17.97 91.25,17.4 90.55,16.7 J1.4 | v79.69,21.59 78.42,21.59 74.3,17.46 73.28,17.46 72.71,16.89 EPD_C1.1
  Bottom 0.15: v91.25,17.97 91.06,17.97 87.44,21.59 v79.69,21.59
N$14
  Top 0.15: R_CAPACITOR.2 90.17,61.09 91.19,62.1 91.19,63.58 91,63.77 89.09,63.77 88.46,63.14 D7.1
N$17
  Top 0.15: J1.24 80.58,14.8 80.58,22.54 79.31,23.81 EPD_C12.1
N$19
  Top 0.15: J1.22 81.6,14.8 81.6,23.05 82.36,23.81 EPD_C10.1
N$21
  Top 0.15: J1.20 82.55,20.89 85.47,23.81 EPD_C8.1
N$22
  Top 0.15: J1.19 83.06,19.81 87.06,23.81 EPD_C7.1
N$23
  Top 0.15: J1.18 83.57,14.8 83.57,18.8 88.58,23.81 EPD_C6.1
PREVGH  (via drill 0.3)
  Top 0.15: J1.21 82.11,14.8 82.11,21.97 83.95,23.81 EPD_C9.1 84.01,23.81 v84.64,24.45 | v89.03,28.83 91.06,28.83 D5.1
  Bottom 0.15: v84.64,24.45 v89.03,28.83
PREVGL  (via drill 0.3)
  Top 0.15: 80.9,23.81 81.03,23.69 81.03,14.8 J1.23 | v81.15,34.8 81.15,36.13 D4.2 | 80.9,23.81 v81.53,24.45 | 80.9,23.81 EPD_C11.1
  Bottom 0.15: v81.15,34.8 81.15,24.83 v81.53,24.45
RESE  (via drill 0.3)
  Top 0.15: v92.49,15.68 92.49,15.88 92.24,16.13 91.31,16.13 91.06,15.88 J1.3 | v72.2,12.51 71.12,11.43 R3.1 | v70.93,14.48 70.93,15.56 Q3.2
  Bottom 0.15: v92.49,15.68 89.31,12.51 v72.2,12.51 72.2,12.57 70.93,13.84 v70.93,14.48
RESE'
  Top 0.15: R3.2 71.06,12.7 70.8,12.95 69.41,12.95 R2.2 69.34,12.95 69.22,12.95 67.63,11.37 67.63,11.11 SJ1.2
RESET  (via drill 0.3)
  Top 0.15: R_RESET.2 52.26,109.03 51.24,109.03 50.8,109.47 RESET_BUTTON.3 50.74,109.47 48.66,109.47 | 48.66,109.47 47.31,109.47 RESET_BUTTON.4 | C5.1 44.79,106.77 44.79,104.9 46.57,103.12 IC1.1 47.5,103.19 v46.74,102.42 | v10.22,55.44 10.22,45.59 U2.3 | v48.66,108.66 48.66,109.47
  Bottom 0.15: v10.22,55.44 10.22,60.9 9.4,61.72 9.4,65.09 v46.74,102.42 46.74,102.49 48.66,104.41 v48.66,108.66
RTC_RST
  Top 0.15: U2.16 22.99,62.99 22.99,62.8 32.13,53.66 32.51,53.66 33.4,52.77 33.4,52.58 33.72,52.26 80.58,52.26 86.93,58.61 86.93,58.93 U3.4
RX
  Top 0.15: U2.24 12.83,67.44 13.53,68.14 TP2.TP
SCK  (via drill 0.3)
  Top 0.15: v85.6,16.7 86.04,16.26 J1.13 | v54.61,26.29 50.99,26.29 TP8.TP 50.93,26.35 50.93,32.7 R6.1 | v44.01,52.7 42.74,53.98 42.55,53.98 U1.6 | D10.1 50.86,35.81 v49.66,34.61 v47.12,34.61 | v16.13,43.24 14.1,45.28 14.1,45.53 U2.6 | v3.81,66.1 3.81,90.81 4.45,91.44 4.95,91.44 J4.P5
  Bottom 0.15: v85.6,16.7 64.2,16.7 v54.61,26.29 54.61,29.08 49.37,34.32 | v44.01,52.7 44.01,39.69 49.37,34.32 | 49.37,34.32 v49.66,34.61 | v47.12,34.61 46.48,35.24 29.4,35.24 21.4,43.24 v16.13,43.24 11.81,43.24 8,47.05 8,61.91 v3.81,66.1
SCL  (via drill 0.3)
  Top 0.15: R2-PINH.1 156.84,6.79 157.35,6.29 159.77,6.29 160.53,7.05 160.53,11.94 158.75,13.72 SENSOR2.4 158.81,13.72 v159.32,14.22 | v145.35,51.24 141.03,55.56 140.72,55.56 U4.7 | v165.29,31.3 165.29,20.83 J3.4 | v27.5,53.21 17.91,62.8 17.91,62.99 U2.20 | v32.32,53.21 33.59,51.94 v87.31,51.94 | U3.16 90.81,49.66 91.06,49.91 v91.44,49.91 91.5,49.91 92.71,48.7 v95.25,48.7
  Bottom 0.15: v159.32,14.22 165.29,20.19 v165.29,31.3 v145.35,51.24 135.64,51.24 133.1,48.7 v95.25,48.7 | v32.32,53.21 v27.5,53.21 | v87.31,51.94 89.34,49.91 v91.44,49.91
SDA  (via drill 0.3)
  Top 0.15: 159.51,14.67 160.84,13.34 160.84,6.92 159.89,5.97 156.59,5.97 155.77,6.79 155.64,6.79 R1_PINH.1 | 159.51,14.67 158.56,14.67 157.92,14.03 157.92,13.78 SENSOR2.3 | v145.99,51.24 141.22,56.01 140.72,56.01 U4.8 | v164.4,32.83 164.4,20.45 164.62,20.23 | 164.62,20.23 165.04,19.81 165.29,19.81 J3.3 | v159.51,15.11 159.51,14.67 | 164.62,20.23 v164.27,19.88 | v23.62,64.14 20,64.14 19.18,63.31 U2.19 | v88.84,48.45 88.84,48.96 89.47,49.59 U3.15
  Bottom 0.15: v164.4,32.83 v145.99,51.24 145.99,51.31 144.78,52.51 97.98,52.51 93.92,48.45 v88.84,48.45 80.96,56.33 31.81,56.33 24,64.14 v23.62,64.14 | v164.27,19.88 v159.51,15.11
SRC
  Top 0.3: C4.2 96.39,32.19 96.39,30.67 94.61,28.89 D5.2 | Q3.3 70.23,17.65 70.61,17.65 72.33,15.94 78.42,15.94 80.26,14.1 92.33,14.1 94.49,16.26 94.49,28.77 D5.2 | L1.1 82.87,33.66 88.47,33.66 93.29,28.83 94.36,28.83 D5.2
SS_SD  (via drill 0.3)
  Top 0.15: R10.1 9.21,101.47 9.78,101.47 11.62,99.63 D8.1 11.62,99.5 11.62,89.41 v7.11,84.9 | v10.67,53.91 11.49,53.09 11.49,45.59 U2.4 | v5.97,86.04 5.97,87.63 5.46,88.14 J4.P2
  Bottom 0.15: v10.67,53.91 8.64,55.94 8.64,83.38 v7.11,84.9 v5.97,86.04
TX
  Top 0.15: U2.25 11.49,63.06 11.49,67.37 10.73,68.14 TP1.TP
USB_D+  (via drill 0.3)
  Top 0.15: v153.42,51.75 154.43,51.75 D1.1 | v24.96,53.59 24.96,46.29 24.26,45.59 U2.14
  Bottom 0.15: v153.42,51.75 145.99,51.75 133.16,64.58 23.43,64.58 23.18,64.33 23.18,63.88 24.96,62.1 v24.96,53.59
USB_D-  (via drill 0.3)
  Top 0.15: v132.91,49.15 151.57,49.15 152.21,49.78 154.43,49.78 D1.3 | v48.32,45.91 43.24,45.91 v40.7,43.37 | v23.88,44.39 22.99,45.28 22.99,45.53 U2.13
  Bottom 0.15: v132.91,49.15 95.06,49.15 91.82,45.91 v48.32,45.91 | v40.7,43.37 27.62,43.37 26.61,44.39 v23.88,44.39
VBAT
  Top 0.3: U4.2 138.75,55.56 138.75,55.12 U4.3 138.56,55.05 138.18,55.05 137.29,54.16 137.16,54.04 | Q1.3 136.65,50.16 136.65,53.53 137.16,54.04 | TP3.TP 125.41,61.53 125.41,59.18 130.94,53.66 MCP73831.3 131,53.53 132.84,53.53 133.86,54.55 C2_BAT.1 133.99,54.61 134.56,54.04 137.16,54.04
VBUS
  Top 0.3: D1.5 156.91,50.74 156.53,50.74 155.89,50.1 155.89,48.2 C4_USB.1 155.83,48.07 155.83,46.67 C5_USB.1 155.7,46.61 155.32,46.61 PFMF.050.1.2 152.59,44.07 139.7,44.07 135.83,47.94 Q1.1 135.7,48.07 133.22,48.07 128.4,52.9 128.4,53.34 MCP73831.4 128.33,53.47 126.43,53.47 CHG_LED.A 126.3,53.53 125.6,54.23 122.3,54.23 121.54,53.47 C1_BAT.1 121.41,53.34 118.81,50.74 118.81,47.18 TP14.TP 118.72,43.08 121.16,40.64 R1_PWRUSB.2 121.22,40.51 122.62,40.51 122.87,40.77 D2.2
VRTC
  Top 0.3: C8.1 88.27,46.48 88.27,49.59 U3.14 88.27,49.78 88.84,50.35 88.84,50.99 | 88.84,50.99 88.84,61.02 R_CAPACITOR.1 | 88.84,50.99 91.12,50.99 91.95,50.16 95.89,50.16 96.77,49.28 97.79,49.28 C10_SUPERCAP.2
VUSB
  Top 0.3: J2.A9 164.53,56.83 164.53,56.58 J2.B4 164.66,56.52 165.16,56.52 165.35,56.33 165.35,52.26 165.16,52.07 164.66,52.07 J2.B9 164.53,52.01 164.53,51.75 J2.A4 163.43,51.75 163.04,51.37 163.04,50.28 157.21,44.45 PFMF.050.1.1

## Text on the board
tPlace: TX | RX | VBAT | GND | VBUS | 3V3 | INT_RTC | EPD_3V3_C | EPD_3V3 | MISO | MOSI | SCK | GND | EPD_BUSY | EPD_CS | EPD_DC | EPD_RST